# Altium PCB pcb.PcbDoc (part 2 of 6)
Units mm, origin at the board's own origin, x right, y up, seen from the top; angles counter-clockwise.
Board outline 163.6 x 137.4 mm, 4 copper layers (Top Layer, GND2, GND3, Bottom Layer), stack 1.586 mm thick; 362 components, 323 nets, 1261 pads, 657 vias.
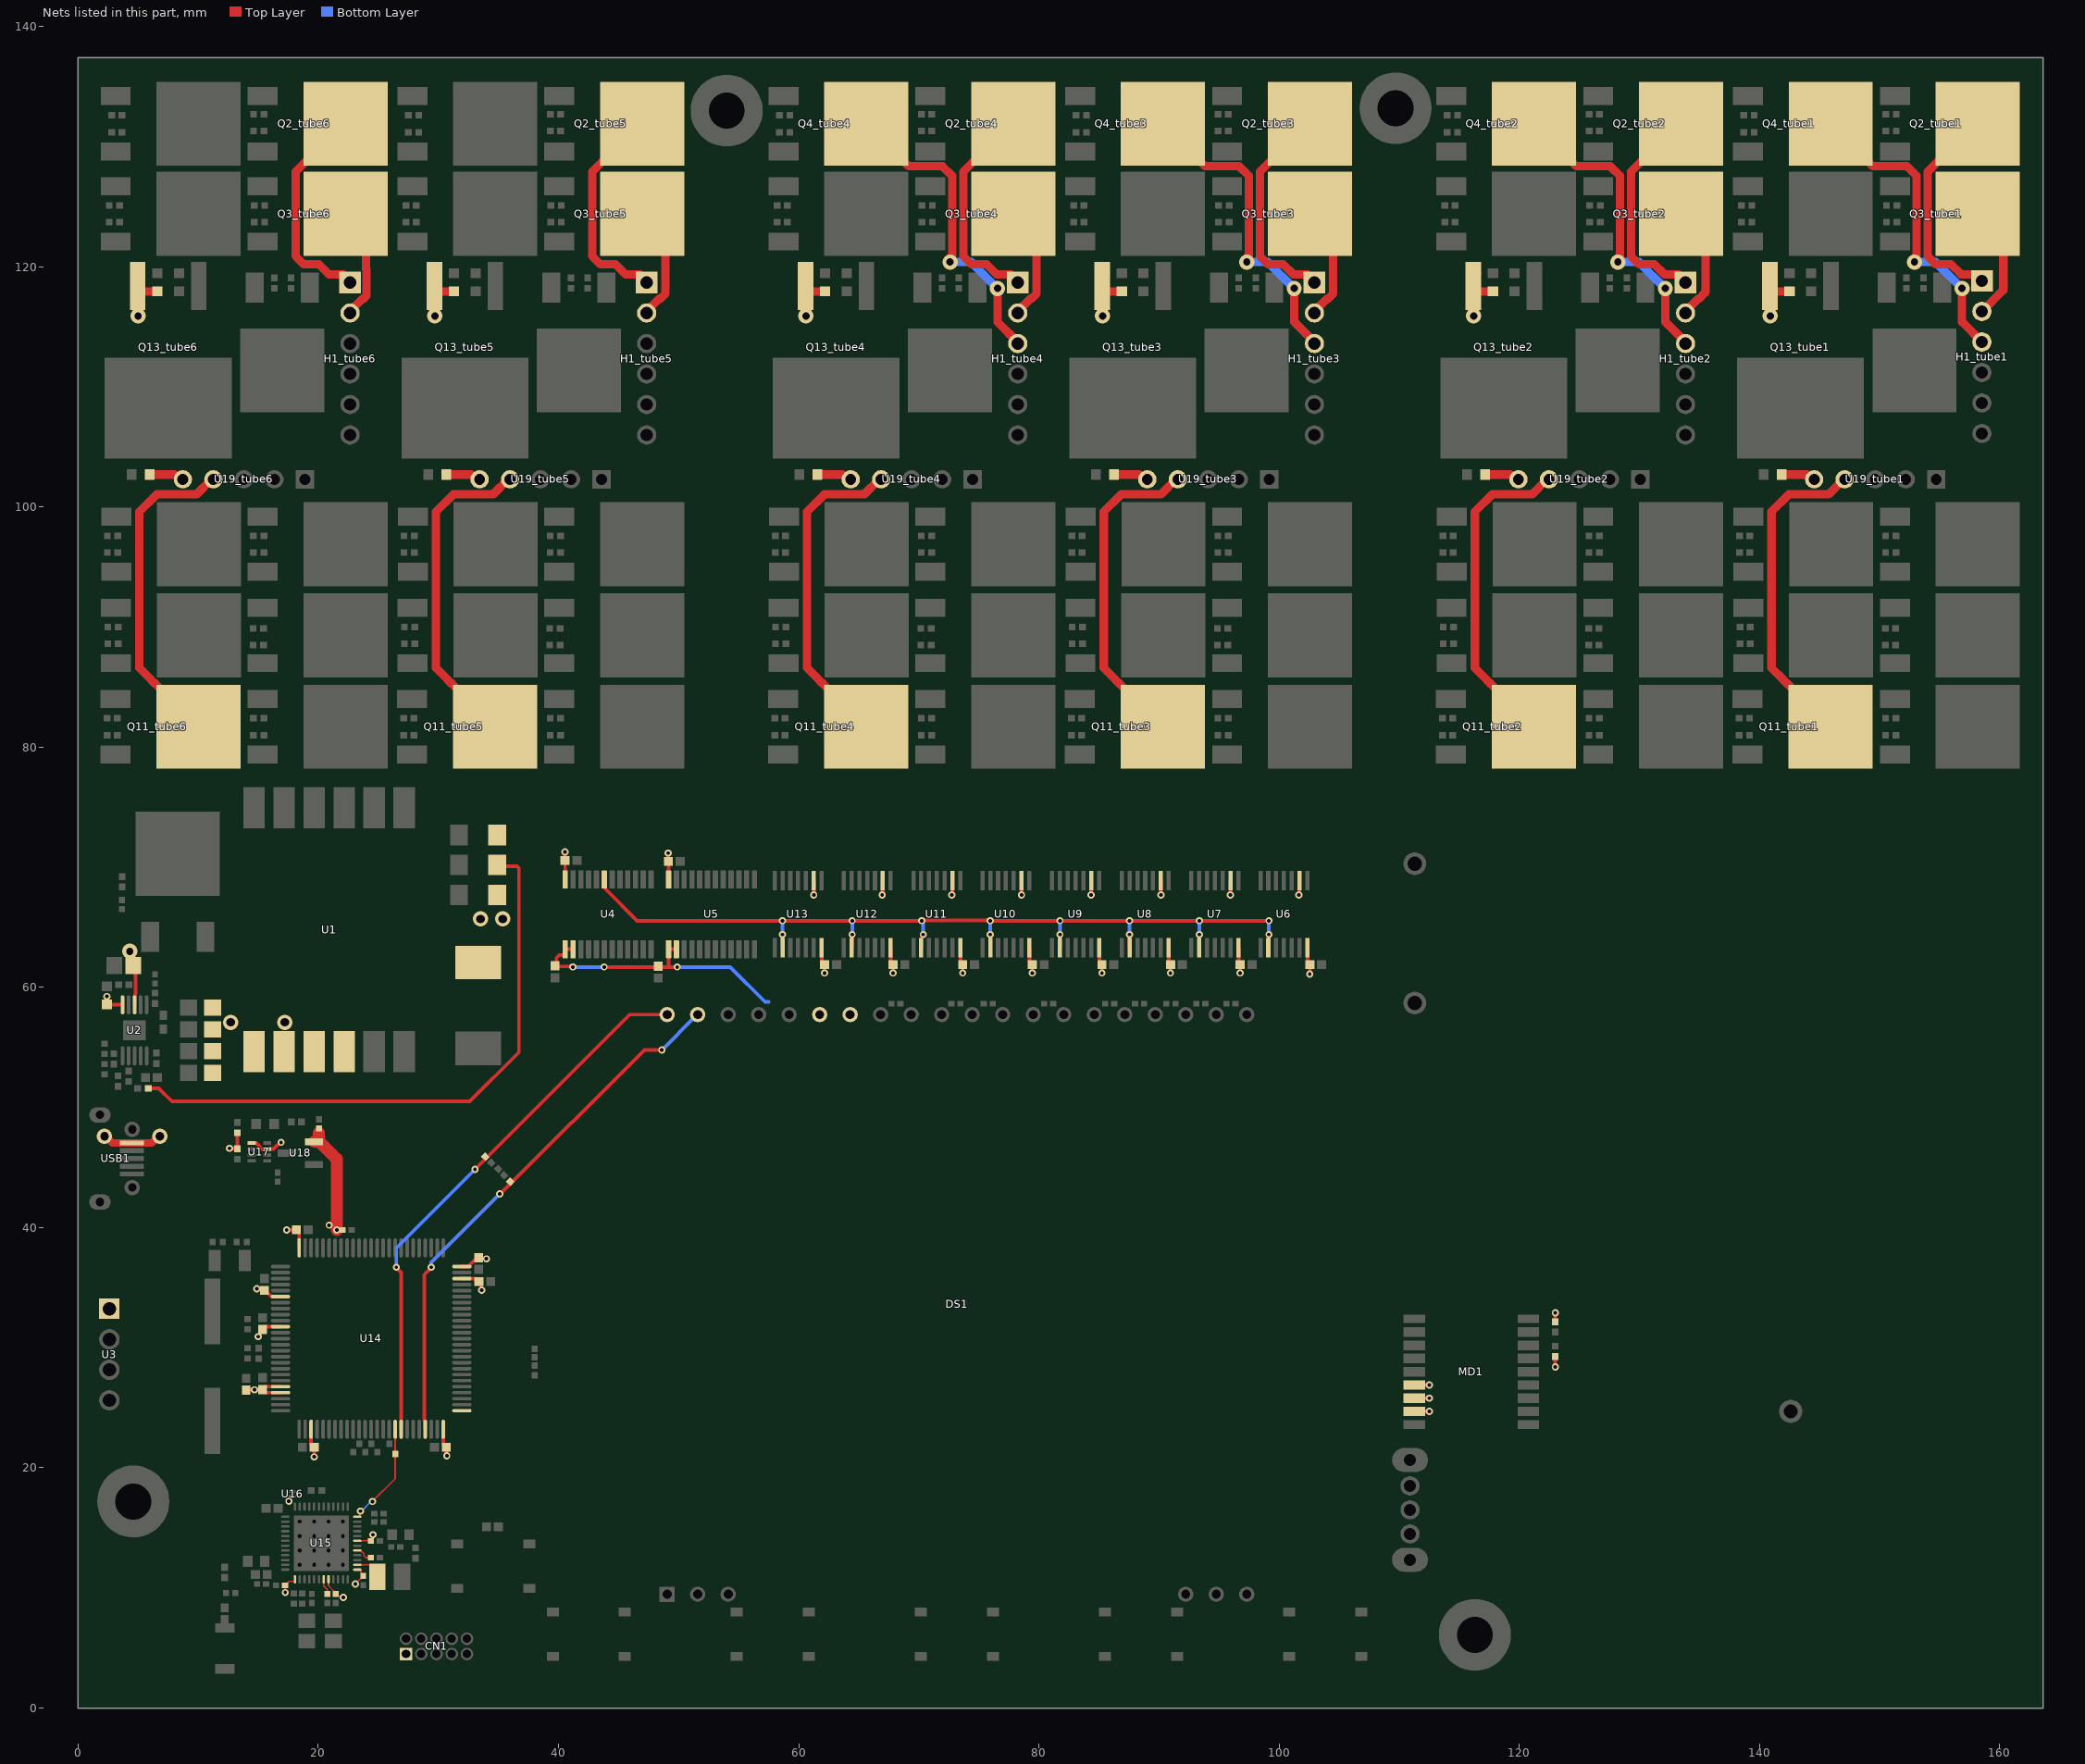
[diagram p4: the nets of this part, all layers, seen from the top]

## Footprints (in the part's own frame and the unit in brackets; to place one, negate y for a bottom-side part, rotate by r counter-clockwise, add the part's x,y. Pads: shape width x height; smd on the part's side, far side on the other; paste and mask are expansions set on the pad) (continued)
DA2032-ALD [mm] "Audio Transformers. SMD-12 Audio Transformers ROHS"
  rect 3.43x1.79 smd: 1(-10.155,6.25) 2(-10.155,3.75) 3(-10.155,1.25) 4(-10.155,-1.25) 5(-10.155,-3.75) 6(-10.155,-6.25) 7(10.155,-6.25) 8(10.155,-3.75) 9(10.155,-1.25) 10(10.155,1.25) 11(10.155,3.75) 12(10.155,6.25)
  silkscreen extent -7.5,-8.6 7.5,8.6, body extent -11,-8.6 11,8.6, height 8.64
"EA DOGL128W-6" [mil]
  rect 50x50 / inner round 60 / far side rect 50x50 hole 30 paste-99999 mask+0: 1(-995,915)
  round 50 / inner round 60 / far side round 50 hole 30 paste-99999 mask+0: 2(-995,815) 3(-995,715) 18(-995,-785) 19(-995,-885) 20(-995,-985) 21(905,-985) 22(905,-885) 23(905,-785) 24(905,-685) 25(905,-585) 26(905,-485) 27(905,-385) 28(905,-285) 29(905,-185) 30(905,-85) 31(905,15) 32(905,115) 33(905,215) 34(905,315) 35(905,415) 36(905,515) 37(905,615) 38(905,715) 39(905,815) 40(905,915)
  silkscreen extent -994,-1374 904,1304, body extent -1000,-1369 920,1299, height 115
FP-CL50-IPC_C [mm]
  rect 0.515x0.472 smd paste+0 mask+0: 1(-0.379,0) 2(0.379,0)
  silkscreen extent -0.2,0.67 0.01,0.67, body extent -0.74,-0.38 0.74,0.38, height 0.25
FP-CL165-IPC_C [mm]
  rect 0.515x0.472 smd paste+0 mask+0: 1(-0.379,0) 2(0.379,0)
  silkscreen extent -0.64,-0.67 0.64,0.67, body extent -0.74,-0.38 0.74,0.38, height 0.25
FP-CL282-IPC_C [mm]
  rect 0.515x0.472 smd paste+0 mask+0: 1(-0.379,0) 2(0.379,0)
  silkscreen extent -0.64,0.67 0.64,0.67, body extent -0.74,-0.38 0.74,0.38, height 0.25
FP-CL388-IPC_C [mm]
  rect 0.515x0.472 smd paste+0 mask+0: 1(-0.379,0) 2(0.379,0)
  silkscreen extent -0.64,-0.67 0.64,0.67, body extent -0.74,-0.38 0.74,0.38, height 0.25
FP-CL542-IPC_C [mm]
  rect 0.515x0.472 smd paste+0 mask+0: 1(-0.379,0) 2(0.379,0)
  silkscreen extent -0.64,-0.67 0.64,-0.67, body extent -0.74,-0.38 0.74,0.38, height 0.25
FP-GJM155-0_05-IPC_B [mm]
  rect 0.615x0.572 smd paste+0 mask+0: 1(-0.429,0) 2(0.429,0)
  silkscreen extent -0.74,-0.69 0.74,0.69, body extent -0.89,-0.44 0.89,0.44, height 0.25
FP-LQG15HH_02-IPC_A [mm]
  rect 0.715x0.672 smd paste+0 mask+0: 1(-0.479,0) 2(0.479,0)
  silkscreen extent -0.55,-0.74 0.84,0.74, body extent -1.04,-0.54 1.04,0.54, height 0.25
FP-LQG15HH_02-IPC_C [mm]
  rect 0.515x0.472 smd paste+0 mask+0: 1(-0.379,0) 2(0.379,0)
  silkscreen extent -0.64,-0.67 0.64,0.67, body extent -0.74,-0.38 0.74,0.38, height 0.25
FP-LQM2HPN_G0-IPC_B [mm]
  rect 1.355x2.206 smd paste+0 mask+0: 1(-1.026,0) 2(1.026,0)
  silkscreen extent -1.7,-1.5 1.7,1.5, body extent -1.95,-1.35 1.95,1.35, height 0.25
FP-MAX-M10S-00B-MFG [mm]
  rect 1.8x0.7 smd paste-1000 mask+0: 1(-4.75,4.4) 9(-4.75,-4.4) 10(4.75,-4.4) 18(4.75,4.4)
  rect 1.8x0.8 smd paste-1000 mask+0: 2(-4.75,3.3) 3(-4.75,2.2) 4(-4.75,1.1) 5(-4.75,0) 6(-4.75,-1.1) 7(-4.75,-2.2) 8(-4.75,-3.3) 11(4.75,-3.3) 12(4.75,-2.2) 13(4.75,-1.1) 14(4.75,0) 15(4.75,1.1) 16(4.75,2.2) 17(4.75,3.3)
  silkscreen extent -7,-5.35 4.9,5.35, body extent -5.75,-5.45 5.75,5.45, height 0.25
FP-PG-TO252-3-MFG [mm]
  rect 1.5x2.5 smd paste+0 mask+0: 1(-2.3,-4.575) 3(2.3,-4.575)
  rect 7x7 smd paste+0 mask+0: 4(0,2.325)
  silkscreen extent -3.36,-2.28 3.36,-1.55, body extent -3.6,-5.92 3.6,5.92, height 0.25
FP-PW0014A-MFG [mm]
  rect 1.6x0.35 smd paste-1000 mask+0: 1(-2.8,1.95) 2(-2.8,1.3) 3(-2.8,0.65) 4(-2.8,0) 5(-2.8,-0.65) 6(-2.8,-1.3) 7(-2.8,-1.95) 8(2.8,-1.95) 9(2.8,-1.3) 10(2.8,-0.65) 11(2.8,0) 12(2.8,0.65) 13(2.8,1.3) 14(2.8,1.95)
  silkscreen extent -4.32,-2.55 2.25,2.55, body extent -3.7,-2.8 3.7,2.8, height 0.25
FP-PW0024A-MFG [mm]
  rrect22% 1.5x0.45 smd paste+0 mask+0: 1(-2.9,3.575) 2(-2.9,2.925) 3(-2.9,2.275) 4(-2.9,1.625) 5(-2.9,0.975) 6(-2.9,0.325) 7(-2.9,-0.325) 8(-2.9,-0.975) 9(-2.9,-1.625) 10(-2.9,-2.275) 11(-2.9,-2.925) 12(-2.9,-3.575) 13(2.9,-3.575) 14(2.9,-2.925) 15(2.9,-2.275) 16(2.9,-1.625) 17(2.9,-0.975) 18(2.9,-0.325) 19(2.9,0.325) 20(2.9,0.975) 21(2.9,1.625) 22(2.9,2.275) 23(2.9,2.925) 24(2.9,3.575)
  silkscreen extent -4.37,-3.95 1.78,3.95, body extent -3.75,-4.2 3.75,4.2, height 0.25
HMT-2.54-1_5PM [mil] "Female Headers. -40C~+105C 1 1x5P 2.54mm 2.54mm 3.2mm 3A 5P 8.5mm Brass Gold Square Hole Through Hole Top ,P=2.54mm Female Headers ROHS"
  rect 60x60 hole 36: 1(-200,0)
  round 60 hole 36: 2(-100,0) 3(0,0) 4(100,0) 5(200,0)
  silkscreen extent -250,-50 250,50, body extent -258,-49 258,49, height 335
"HX JN1.27-2x5P ZZ H4.9" [mm] "IDC Connectors. -40C~+105C 1.27mm 1.27mm 1A 2 2x5P 5 500V Black Copper Gold IDC Header Through Hole Plugin,P=1.27mm IDC Connectors ROHS"
  rect 1.05x1.05 hole 0.7: 1(-2.54,-0.635)
  round 1.05 hole 0.7: 2(-2.54,0.635) 3(-1.27,-0.635) 4(-1.27,0.635) 5(0,-0.635) 6(0,0.635) 7(1.27,-0.635) 8(1.27,0.635) 9(2.54,-0.635) 10(2.54,0.635)
  silkscreen extent -6.32,-2.5 6.33,2.5, body extent -6.27,-2.5 6.27,2.5
IC_NRF7002-QFAA-R7 [mm]
  oval 0.7x0.2 smd: 1(-3,2.2) 2(-3,1.8) 3(-3,1.4) 4(-3,1) 5(-3,0.6) 6(-3,0.2) 7(-3,-0.2) 8(-3,-0.6) 9(-3,-1) 10(-3,-1.4) 11(-3,-1.8) 12(-3,-2.2) 25(3,-2.2) 26(3,-1.8) 27(3,-1.4) 28(3,-1) 29(3,-0.6) 30(3,-0.2) 31(3,0.2) 32(3,0.6) 33(3,1) 34(3,1.4) 35(3,1.8) 36(3,2.2)
  oval 0.2x0.7 smd: 13(-2.2,-3) 14(-1.8,-3) 15(-1.4,-3) 16(-1,-3) 17(-0.6,-3) 18(-0.2,-3) 19(0.2,-3) 20(0.6,-3) 21(1,-3) 22(1.4,-3) 23(1.8,-3) 24(2.2,-3) 37(2.2,3.05) 38(1.8,3.05) 39(1.4,3.05) 40(1,3.05) 41(0.6,3.05) 42(0.2,3.05) 43(-0.2,3.05) 44(-0.6,3.05) 45(-1,3.05) 46(-1.4,3.05) 47(-1.8,3.05) 48(-2.2,3.05)
  rect 4.6x4.6 smd paste-3: 49(0,0)
  round 0.63 hole 0.33 mask+0: 50(-1.8,1.8) 51(-0.6,1.8) 52(0.6,1.8) 53(1.8,1.8) 54(-1.8,0.6) 55(-0.6,0.6) 56(0.6,0.6) 57(1.8,0.6) 58(-1.8,-0.6) 59(-0.6,-0.6) 60(0.6,-0.6) 61(1.8,-0.6) 62(-1.8,-1.8) 63(-0.6,-1.8) 64(0.6,-1.8) 65(1.8,-1.8)
  silkscreen extent -4.1,-3 3,3, body extent -3,-3 3,3, height 0.9
IRF9640STRLPbF [mm] "MOSFETs. -55C~+150C 1 P-Channel 1.2nF 125W 200V 370pF 44nC@10V 4V 500mohm@10V 6.8A 81pF P-Channel TO-263(D2PAK) MOSFETs ROHS"
  rect 4x1.3 smd: 1(-5.086,2.54) 3(-5.086,-2.54)
  rect 8.4x10.566 smd: 4(5.086,0)
  silkscreen extent -6.33,-5.08 0.61,5.09, body extent -6.31,-5.1 8.71,5.1
JT-2450AT18A100-2_V [mm] "Chip Antenna, 2-Leads, Body 3.4x1.8mm"
  rect 0.8x1.6 smd: 1(-1.7,0) 2(1.7,0)
  silkscreen extent -0.91,-0.9 0.91,0.9, body extent -1.7,-0.9 1.7,0.9, height 1.4
LT-MSE-10-EDP_N [mm] "SOP, 10-Leads, Body 3.1x3.1mm, Pitch 0.5mm, Thermal Pad 1.88x1.68mm, IPC Medium Density"
  oval 1.6x0.3 smd: 1(-2.125,1) 2(-2.125,0.5) 3(-2.125,0) 4(-2.125,-0.5) 5(-2.125,-1) 6(2.125,-1) 7(2.125,-0.5) 8(2.125,0) 9(2.125,0.5) 10(2.125,1)
  rect 1.68x1.88 smd: 11(0,0)
  silkscreen extent -0.92,-1.55 0.92,1.55, body extent -1.55,-1.55 1.55,1.55, height 1.1
MicroXNJ [mm] "USB Connectors. -20C~+85C 1 1.8A 30V 5,000 times 5P Black Female Micro-B Surface Mount, Right Angle USB 2.0 SMD USB Connectors ROHS"
  rect 2x0.4 smd: 1(-1.332,-1.3) 2(-1.332,-0.65) 3(-1.332,0) 4(-1.332,0.65) 5(-1.332,1.3)
  round 1.3 hole 0.7: 6(-1.34,2.425) 9(-1.34,-2.425)
  oval 1.8x1.3 hole 0.7 slot 1.1 at 90 deg: 7(1.34,3.625) 8(1.34,-3.625)
  silkscreen extent -4.19,-7.95 0.07,3.79, body extent -2.11,-4.02 3.85,3.98
Molex_GPS_L1_L5_GLONASS_36MM_STACKED_2116240001 [mm]
  round 1.93 hole 1.168: 1(0,4)
  silkscreen extent -18.54,-18.54 18.54,18.54, body extent -17.95,-18.03 19.05,17.97, height 7.7
ONSC-SMC-2-403-03_V [mil] "Molded, 2-Leads, Body 6.86x5.84mm"
  rect 110x150 smd: 1(-140.49,0) 2(140.49,0)
  silkscreen extent -222,-115 135,115, body extent -135,-115 135,115, height 99
Q13FC13500004 [mm] "Crystals. -40C~+85C 12.5pF 32.768kHz 70kohm Crystal Oscillator +/-20ppm SMD3215-2P Crystals ROHS"
  rect 1x1.8 smd: 1(-1.25,0) 2(1.25,0)
  silkscreen extent -0.47,-0.76 0.47,0.76, body extent -1.6,-0.75 1.6,0.75
"RES 0402_1005" [mm] "Chip Resistor, 2-Leads, Body 1.0x0.5mm, IPC Medium Density"
  rect 0.75x0.6 smd: 1(-0.575,0) 2(0.575,0)
  body extent -0.5,-0.25 0.5,0.25, height 0.35
SOT-23A-CB3_N [mm] "SOT346, 3-Leads, Body 2.9x1.5mm, Pitch 0.95mm, Lead Span 2.6mm, IPC Medium Density"
  rect 1.5x0.6 smd: 1(-1.15,0.95) 2(-1.15,-0.95) 3(1.15,0)
  silkscreen extent -1.28,-1.55 0.9,1.92, body extent -0.9,-1.55 0.9,1.55, height 1.45
"SS12D07VG4 087" [mm] "Slide Switches. SS12D07VG4 087"
  round 1.6 hole 1: 1(-2,0) 2(0,0) 3(2,0)
  oval 2x3 hole 1 slot 1.8 at 0 deg: 4(4.15,0) 5(-4.15,0)
  silkscreen extent -4.4,-2.3 4.4,2.3, body extent -4.4,-2.3 4.4,2.3
STM32L433VCT6 [mm] "ST Microelectronics. -40C~+85C 1.71V~3.6V 12bit 12bit 256KB 32 Bit 64KB 80MHz 83 ARM Cortex-M4 Built-in FLASH LQFP-100(14x14) Microcontrollers (MCU/MPU/SOC) ROHS"
  oval 0.3x1.6 smd: 1(-6,-7.55) 2(-5.5,-7.55) 3(-5,-7.55) 4(-4.5,-7.55) 5(-4,-7.55) 6(-3.5,-7.55) 7(-3,-7.55) 8(-2.5,-7.55) 9(-2,-7.55) 10(-1.5,-7.55) 11(-1,-7.55) 12(-0.5,-7.55) 13(0,-7.55) 14(0.5,-7.55) 15(1,-7.55) 16(1.5,-7.55) 17(2,-7.55) 18(2.5,-7.55) 19(3,-7.55) 20(3.5,-7.55) 21(4,-7.55) 22(4.5,-7.55) 23(5,-7.55) 24(5.5,-7.55) 25(6,-7.55) 51(6,7.55) 52(5.5,7.55) 53(5,7.55) 54(4.5,7.55) 55(4,7.55) 56(3.5,7.55) 57(3,7.55) 58(2.5,7.55) 59(2,7.55) 60(1.5,7.55) 61(1,7.55) 62(0.5,7.55) 63(0,7.55) 64(-0.5,7.55) 65(-1,7.55) 66(-1.5,7.55) 67(-2,7.55) 68(-2.5,7.55) 69(-3,7.55) 70(-3.5,7.55) 71(-4,7.55) 72(-4.5,7.55) 73(-5,7.55) 74(-5.5,7.55) 75(-6,7.55)
  oval 1.6x0.3 smd: 26(7.55,-6) 27(7.55,-5.5) 28(7.55,-5) 29(7.55,-4.5) 30(7.55,-4) 31(7.55,-3.5) 32(7.55,-3) 33(7.55,-2.5) 34(7.55,-2) 35(7.55,-1.5) 36(7.55,-1) 37(7.55,-0.5) 38(7.55,0) 39(7.55,0.5) 40(7.55,1) 41(7.55,1.5) 42(7.55,2) 43(7.55,2.5) 44(7.55,3) 45(7.55,3.5) 46(7.55,4) 47(7.55,4.5) 48(7.55,5) 49(7.55,5.5) 50(7.55,6) 76(-7.55,6) 77(-7.55,5.5) 78(-7.55,5) 79(-7.55,4.5) 80(-7.55,4) 81(-7.55,3.5) 82(-7.55,3) 83(-7.55,2.5) 84(-7.55,2) 85(-7.55,1.5) 86(-7.55,1) 87(-7.55,0.5) 88(-7.55,0) 89(-7.55,-0.5) 90(-7.55,-1) 91(-7.55,-1.5) 92(-7.55,-2) 93(-7.55,-2.5) 94(-7.55,-3) 95(-7.55,-3.5) 96(-7.55,-4) 97(-7.55,-4.5) 98(-7.55,-5) 99(-7.55,-5.5) 100(-7.55,-6)
  silkscreen extent -7.03,-8 6.25,6.25, body extent -8,-8 8,8
TCK106AG,LF [mm] "Power Distribution Switches. -40C~+85C 1 1.1V~5.5V 1A 34mohm Active High Load Switch WCSPD-4(0.79x0.79) Power Distribution Switches ROHS"
  round 0.208 smd: A1(-0.2,0.2) A2(0.2,0.2) B1(-0.2,-0.2) B2(0.2,-0.2)
  body extent -0.39,-0.39 0.4,0.39
TPS2117DRLR [mm] "Analog Switches / Multiplexers. -40C~+105C 1.6V~5.5V 2 20mohm 2:1 Fault protection SOT-5X3 Analog Switches, Multiplexers ROHS"
  rect 0.28x0.68 smd: 1(-0.75,-0.64) 2(-0.25,-0.64) 3(0.25,-0.64) 4(0.75,-0.64) 5(0.75,0.64) 6(0.25,0.64) 7(-0.25,0.64) 8(-0.75,0.64)
  body extent -1.05,-0.8 1.05,0.8
TS-1187A-B-A-B [mm] "Tactile Switches. -30C~+85C 1.5mm 1.6N 100,000 cycles 12V 5.1mm 5.1mm 50mA Gold No Round Button SPST Surface Mount,Vertical Without Bracket SMD-4P,5.1x5.1mm Tactile Switches ROHS"
  rect 1x0.75 smd: 1(-3,1.85) 2(3,1.85) 3(-3,-1.85) 4(3,-1.85)
  silkscreen extent -2.55,-2.55 2.55,2.55, body extent -3.25,-2.6 3.25,2.6
TZ0308D [mm] "Crystals. -30C~+85C 30ohm 40MHz 9pF Crystal Oscillator +/-10ppm SMD3225-4P Crystals ROHS"
  rect 1.4x1.2 smd: 1(-1.1,-0.85) 2(1.1,-0.85) 3(1.1,0.85) 4(-1.1,0.85)
  silkscreen extent -2.26,-1.91 2.03,1.68, body extent -1.6,-1.25 1.6,1.25
X49SM4MSD2SC [mm] "Crystals. -20C~+70C 120ohm 20pF 4MHz Crystal Oscillator +/-20ppm +/-30ppm HC-49S-SMD Crystals ROHS"
  rect 5.5x1.3 smd: 1(4.553,0) 2(-4.553,0)
  silkscreen extent -5.72,-2.41 5.71,2.41, body extent -6.25,-2.25 6.25,2.25

## Part data
C1 C2 C3: "Multilayer Ceramic Capacitors MLCC - SMD/SMT. 220nF 250V X7R +/-10% 1206 Multilayer Ceramic Capacitors MLCC - SMD/SMT ROHS", JLCPCB Part #=C1322383, Manufacturer="FH (Guangdong Fenghua Advanced Tech)", Component Type=Capacitors, Design Item ID=1206B224K251NT, Manufacturer Part Number=1206B224K251NT
C4: library part CMP-13271-000627-1, "Cap Ceramic 3.3nF 50V X7R ±10% SMD 0402 +125°C Paper T/R", Capacitance=3.3nF, Case Code (Imperial)=0402, Case Code (Metric)=1005, Dielectric=X7R, Max Operating Temperature=125°C, Min Operating Temperature=-55°C, Package Quantity=1, Tolerance=10%, Voltage=50V, Case/Package=0402, Contact Plating=Tin, Depth=0.5mm, Height=0.5mm, Lead Free="Lead Free", Length=1mm, Material=Ceramic, Mount="Surface Mount", Packaging="Tape and Reel", Radiation Hardening=No, Thickness=0.022inch, Voltage Rating=50V, Voltage Rating (DC)=50V, Width=0.02inch
C5 C6 C7 C8: "Multilayer Ceramic Capacitors MLCC - SMD/SMT. 47uF 6.3V X5R +/-20% 0805 Multilayer Ceramic Capacitors MLCC - SMD/SMT ROHS", JLCPCB Part #=C16780, Manufacturer="Samsung Electro-Mechanics", Component Type=Capacitors, Design Item ID=CL21A476MQYNNNE, Manufacturer Part Number=CL21A476MQYNNNE
C9 C50: library part CMP-13271-000387-1, "Cap Ceramic 10nF 50V X7R ±10% SMD 0402 +125°C Paper T/R", Capacitance=10nF, Case Code (Imperial)=0402, Case Code (Metric)=1005, Dielectric=X7R, Max Operating Temperature=125°C, Min Operating Temperature=-55°C, Package Quantity=1, Tolerance=10%, Voltage=50V, Case/Package=0402, Contact Plating=Tin, Depth=0.5mm, Height=0.5mm, Lead Free="Lead Free", Length=1mm, Material=Ceramic, Mount="Surface Mount", Packaging="Tape and Reel", Radiation Hardening=No, Thickness=0.022inch, Voltage Rating=50V, Voltage Rating (DC)=50V, Width=0.02inch
C10: "CAP CER 47UF 6.3V X5R 0805", Capacitance="47 µF", Device Package="0805 (2012 Metric)", Manufacturer="Samsung Electro-Mechanics", Operating Temperature="-55°C ~ 85°C", Supplier Part Number 1=1276-1852-1-ND, Temperature Coefficient=X5R, Tolerance=±20%, Voltage - Rated=6.3V, Applications="General Purpose", ComponentLink1Description=Datasheet, ComponentLink1URL=http://www.samsungsem.com/kr/support/product-search/mlcc/CL21A476MQYNNNE.jsp, ComponentLink2Description="DigiKey Link", ComponentLink2URL=https://www.digikey.com/en/products/detail/samsung-electro-mechanics/CL21A476MQYNNNE/3887510, lastupdated="4/6/2026 7:33:17 PM", Lifecycle Status=Active, Minimum Order=1, Mounting Type="Surface Mount, MLCC", Package / Case="0805 (2012 Metric)", Packaging=TapeAndReel, Part Number=CL21A476MQYNNNE, Part Status=Active, partid=3143, price=0.04, series=CL, Size / Dimension="0.079\" L x 0.049\" W (2.00mm x 1.25mm)", Supplier 1=DigiKey, Thickness (Max)="0.057\" (1.45mm)"
C11: "Multilayer Ceramic Capacitors MLCC - SMD/SMT. 100pF 50V C0G +/-5% 0402 Multilayer Ceramic Capacitors MLCC - SMD/SMT ROHS", JLCPCB Part #=C1546, Manufacturer="FH (Guangdong Fenghua Advanced Tech)", Component Type=Capacitors, Design Item ID=0402CG101J500NT, Manufacturer Part Number=0402CG101J500NT
C12 C43: "Multilayer Ceramic Capacitors MLCC - SMD/SMT. 22nF 50V X7R +/-10% 0402 Multilayer Ceramic Capacitors MLCC - SMD/SMT ROHS", JLCPCB Part #=C1532, Manufacturer="FH (Guangdong Fenghua Advanced Tech)", Component Type=Capacitors, Design Item ID=0402B223K500NT, Manufacturer Part Number=0402B223K500NT
C13 C14 C15 C16 C17 C18 C19 C20 C21 C22 C23 C24 C25 C27 C28 C29 C30 C33 C34 C37 C38 C66 C67 C68 C69: library part CMP-2000-05439-1, "Chip Capacitor, 100 nF, +/- 10%, 16 V, -55 to 125 degC, 0402 (1005 Metric), RoHS, Tape and Reel", Capacitance=100nF, Case Size/Dimension=0402, Dielectric=X7R, Manufacturer="Samsung Electro-Mechanics", Rated Voltage=16V, Tolerance (%)=±10%, Datasheet URL=https://datasheet.ciiva.com/29198/458718-da-01-en-vs-kondensator-0402-29198423.pdf, Datasheet Version=Nov-10, Manufacturer URL=http://www.samsungsem.com/global/index.jsp
C26 C40 C46 C51 C52: library part CMP-13271-000548-1, "Cap Ceramic 4.7uF 10V X5R ±20% SMD 0402 +85°C Paper T/R", Capacitance=4.7uF, Case Code (Imperial)=0402, Case Code (Metric)=1005, Dielectric=X5R, Max Operating Temperature=85°C, Min Operating Temperature=-55°C, Package Quantity=10000, Tolerance=20%, Voltage Rating=10V, Case/Package=0402, Lead Free="Lead Free", Length=0.039inch, Mount="Surface Mount", Packaging="Tape and Reel", Thickness=0.022inch, Width=0.02inch
C31 C32 C35: "Multilayer Ceramic Capacitors MLCC - SMD/SMT. 22pF 50V C0G +/-5% 0402 Multilayer Ceramic Capacitors MLCC - SMD/SMT ROHS", JLCPCB Part #=C1555, Manufacturer="FH (Guangdong Fenghua Advanced Tech)", Component Type=Capacitors, Design Item ID=0402CG220J500NT, Manufacturer Part Number=0402CG220J500NT
C36: "Multilayer Ceramic Capacitors MLCC - SMD/SMT. 33pF 50V C0G +/-5% 0402 Multilayer Ceramic Capacitors MLCC - SMD/SMT ROHS", JLCPCB Part #=C1562, Manufacturer="FH (Guangdong Fenghua Advanced Tech)", Component Type=Capacitors, Design Item ID=0402CG330J500NT, Manufacturer Part Number=0402CG330J500NT
C39 C44: "Multilayer Ceramic Capacitors MLCC - SMD/SMT. 25V 470nF X7R +/-10% 0603 Multilayer Ceramic Capacitors MLCC - SMD/SMT ROHS", JLCPCB Part #=C1623, Manufacturer="Samsung Electro-Mechanics", Component Type=Capacitors, Design Item ID=CL10B474KA8NNNC, Manufacturer Part Number=CL10B474KA8NNNC
C41: library part CMP-2008-03808-2, "Multi-Layer Ceramic Capacitor 1pF C0G  ±0.1pF 0402 Paper T/R", Capacitance=1pF, Case Code (Imperial)=0402, Case Code (Metric)=1005, Dielectric=C0G, Max Operating Temperature=125°C, Min Operating Temperature=-55°C, Package Quantity=10000, Temperature Coefficient=30ppm/°C, Voltage=50V, Case/Package=0402, Depth=0.5mm, Height=0.5mm, Lead Free="Lead Free", Lead Pitch=0.3mm, Length=1mm, Mount="Surface Mount", Number of Pins=2, Packaging="Tape and Reel", Radiation Hardening=No, REACH SVHC="No SVHC", Termination=SMD/SMT, Thickness=0.022inch, Voltage Rating=50V, Voltage Rating (DC)=50V, Width=0.02inch
C42: "Multilayer Ceramic Capacitors MLCC - SMD/SMT. 16V 220nF X7R +/-10% 0402 Multilayer Ceramic Capacitors MLCC - SMD/SMT ROHS", JLCPCB Part #=C16772, Manufacturer="Samsung Electro-Mechanics", Component Type=Capacitors, Design Item ID=CL05B224KO5NNNC, Manufacturer Part Number=CL05B224KO5NNNC
C45 C47 C53: library part CMP-13271-001039-1, "Cap Ceramic 2.2uF 6.3V X5R ±20% SMD 0402 +85°C Paper T/R", Capacitance=2.2uF, Case Code (Imperial)=0402, Case Code (Metric)=1005, Dielectric=X5R, Max Operating Temperature=85°C, Min Operating Temperature=-55°C, Package Quantity=10000, Tolerance=20%, Voltage Rating=6.3V, Case/Package=0402, Depth=0.5mm, Height=0.5mm, Lead Free="Lead Free", Length=1mm, Mount="Surface Mount", Packaging="Tape and Reel", Radiation Hardening=No, Thickness=0.022inch, Width=0.02inch
C48 C49 C54 C55 C56 C57 C58 C59 C60 C61 C62 C63 C64 C65: library part CMP-13271-001051-1, "Cap Ceramic 1uF 25V X5R ±10% SMD 0402 +85°C Paper T/R", Capacitance=1uF, Case Code (Imperial)=0402, Case Code (Metric)=1005, Dielectric=X5R, Max Operating Temperature=85°C, Min Operating Temperature=-55°C, Package Quantity=10000, Tolerance=10%, Voltage Rating=25V, Case/Package=0402, Depth=0.5mm, Height=0.5mm, Lead Free="Lead Free", Length=1mm, Material=Ceramic, Mount="Surface Mount", Packaging="Tape and Reel", Radiation Hardening=No, Thickness=0.022inch, Width=0.02inch
CN1: "IDC Connectors. -40C~+105C 1.27mm 1.27mm 1A 2 2x5P 5 500V Black Copper Gold IDC Header Through Hole Plugin,P=1.27mm IDC Connectors ROHS", JLCPCB Part #=C42372547, Manufacturer=hanxia, Component Type=Connectors, Design Item ID="HX JN1.27-2x5P ZZ H4.9", Manufacturer Part Number="HX JN1.27-2x5P ZZ H4.9"
D1: library part CMP-1055-00379-1, "200 V, 3 A Schottky Fast Soft-Recovery Power Rectifier, 2-Pin SMC, Pb-Free, Tape and Reel", Manufacturer="On Semiconductor", ComponentLink1Description="Manufacturer URL", ComponentLink1URL=http://www.onsemi.com/, ComponentLink2Description=Datasheet, ComponentLink2URL=http://www.onsemi.cn/pub_link/Collateral/MBRS3201T3-D.PDF, ComponentLink3Description="Package Specification", ComponentLink3URL=http://www.onsemi.com/pub_link/Collateral/403-03.PDF, Configuration=Single, DatasheetVersion="Rev. 3", IFSM Max (A)=100, Mounting Technology="Surface Mount", PackageDescription="2-Pin Small Molded Package, J-Bend Lead, Body 5.845 x 6.855 mm", PackageReference=SMC-2-403-03, PackageVersion="Rev. E, 08/2005", Packing="Tape and Reel", PartNumber=MBRS3201T3G, RoHS=TRUE, trr Max (ns)=35
DS1: Supplier Part Number 1=1481-1058-ND, Supplier 1=DigiKey
E1: library part CMP-2000-05167-1, "Ceramic Antenna, 2.45 GHZ, 2 W, -40 to 125 degC, 2-Pin SMD, RoHS, Tape and Reel", Manufacturer="Johanson Technology", Maximum Frequency=2500MHz, Minimum Frequency=2400MHz, Package=2Case18-4, Category=Antenna, Datasheet URL=http://www.johansontechnology.com/datasheets/antennas/2450AT18A100.pdf, Datasheet Version="Rev. 1.3, 07/2014", Manufacturer URL=https://www.johansontechnology.com/, Type=Ceramic, Typical Antenna Gain=0.5dB
E2: library part Molex_GPS_L1_L5_GLONASS_36MM_STACKED_2116240001, Supplier Part Number 1=211624-0001, ComponentLink1Description="Suppler 2", ComponentLink1URL=JLCPCB, ComponentLink2Description="Suppler Part Number 2", ComponentLink2URL=C177230, Supplier 1=Newark
H1_tube1 H1_tube2 H1_tube3 H1_tube4 H1_tube5 H1_tube6: "Pin Headers. -40C~+105C 1 1x6P 2.54mm 3.3mm 3A 6P Brass Square Hole Through Hole Top ,P=2.54mm Female Headers ROHS", JLCPCB Part #=C40877, Manufacturer="BOOMELE(Boom Precision Elec)", Manufacturer Part Number=2.54-1*6P, Component Type=Connectors, Design Item ID=2.54-1_6P
L1: library part CMP-06042-016451-1, "Multilayer Type Inductor for Power Lines, 1008 (2520), 3.3μH, 20%, 0.2Ω, 1000mA", Case Code (Imperial)=1008, Case Code (Metric)=2520, Current Rating=1A, DC Resistance (DCR)=200mR, Inductance=3.3uH, Max Operating Temperature=125°C, Min Operating Temperature=-55°C, Package Quantity=3000, Self Resonant Frequency=30MHz, Test Frequency=1MHz, Tolerance=20%, Case/Package=1008, Core Material=Ferrite, Depth=2.2mm, Height=0.9mm, Height - Seated (Max)=0.039inch, Lead Free="Lead Free", Length=2.5mm, Max DC Current=1A, Mount="Surface Mount", Packaging="Tape and Reel", Radiation Hardening=No, RoHS Compliant=Yes, series=LQM2HP_GC, Shielding=Shielded, Termination=SMD/SMT, Width=0.079inch
L2: library part CMP-06042-002811-1, "Multilayer type RF Inductor 3.9nH ±0.3nH 0.14Ω 750mA 0402", Case Code (Imperial)=0402, Case Code (Metric)=1005, Current Rating=300mA, DC Resistance (DCR)=180mR, Inductance=3.9nH, Max Operating Temperature=125°C, Min Operating Temperature=-55°C, Package Quantity=10000, Self Resonant Frequency=6GHz, Test Frequency=100MHz, Case/Package=0402, Core Material=Air, DC Current=300mA, Depth=0.55mm, Height=0.5mm, Height - Seated (Max)=0.022inch, Lead Free="Lead Free", Length=1mm, Max DC Current=300mA, Military Standard=Not, Mount="Surface Mount", Packaging="Tape and Reel", Q Factor=8, Radiation Hardening=No, Shielding=Unshielded, Termination=SMD/SMT, Width=0.02inch
L3: library part CMP-2000-06580-2, "Multilayer type RF Inductor 2.7nH ±0.3nH 0.12Ω 800mA 0402", Case Code (Imperial)=0402, Case Code (Metric)=1005, Current Rating=300mA, DC Resistance (DCR)=150mR, Inductance=2.7nH, Max Operating Temperature=125°C, Min Operating Temperature=-55°C, Package Quantity=10000, Self Resonant Frequency=6GHz, Test Frequency=100MHz, Case/Package=0402, Core Material=Air, DC Current=300mA, Depth=0.55mm, Height=0.5mm, Height - Seated (Max)=0.022inch, Lead Free="Lead Free", Length=1mm, Max DC Current=300mA, Military Standard=Not, Mount="Surface Mount", Packaging="Tape and Reel", Q Factor=8, Radiation Hardening=No, Shielding=Unshielded, Termination=SMD/SMT, Width=0.5mm
MD1: library part CMP-207130-000026-1, "GNSS LCC RX, ROM, TCXO, LNA, SAW"
Q1 Q2_tube1 Q2_tube2 Q2_tube3 Q2_tube4 Q2_tube5 Q2_tube6 Q3_tube1 Q3_tube2 Q3_tube3 Q3_tube4 Q3_tube5 Q3_tube6 Q4_tube1 Q4_tube2 Q4_tube3 Q4_tube4 Q4_tube5 Q4_tube6 Q5_tube1 Q5_tube2 Q5_tube3 Q5_tube4 Q5_tube5 Q5_tube6 Q6_tube1 Q6_tube2 Q6_tube3 Q6_tube4 Q6_tube5 Q6_tube6 Q7_tube1 Q7_tube2 Q7_tube3 Q7_tube4 Q7_tube5 Q7_tube6 Q8_tube1 Q8_tube2 Q8_tube3 Q8_tube4 Q8_tube5 Q8_tube6 Q9_tube1 Q9_tube2 Q9_tube3 Q9_tube4 Q9_tube5 Q9_tube6 Q10_tube1 Q10_tube2 Q10_tube3 Q10_tube4 Q10_tube5 Q10_tube6 Q11_tube1 Q11_tube2 Q11_tube3 Q11_tube4 Q11_tube5 Q11_tube6 Q12_tube1 Q12_tube2 Q12_tube3 Q12_tube4 Q12_tube5 Q12_tube6: library part CMP-32901-000070-1, "MOSFET N-CH 200V 5A DPAK", Continuous Drain Current=5A, Drain To Source Breakdown Voltage=200V, Drain To Source Resistance=600mΩ, Gate To Source Voltage=20V, Input Capacitace At Vds="300pF @ 25V", Manufacturer=Infineon, Max Forward Diode Voltage=1.3V, Max Junction Temp=+175°C, Package=PG-TO252-3, Power Dissipation=43W, Pulse Drain Current=20A, Temperature="-55°C to +175°C", Temperature Range Low=-55°C, Automotive=No, Category=Trans, ComponentLink2Description=Datasheet, ComponentLink2URL=https://www.infineon.com/dgdl/irfr220npbf.pdf?fileId=5546d462533600a40153562d8a7b206f, Depletion Mode=False, Device Class L1="Discrete Semiconductors", Device Class L2=Transistors, Device Class L3=MOSFETs, Digikey Description="MOSFET N-CH 200V 5A DPAK", Drain To Source Voltage=200V, Footprint Url=http://www.irf.com/package/hexfet/dpakfootprint.pdf, Gate Charge At Vgs="15nC @ 10V", Height=2.52mm, Lead Free=Yes, Manufacturer Part Number=IRFR220NTRPBF, Number Of Channels=1, Number Of N Channels=1, Octopart=https://octopart.com/irfr220ntrpbf-infineon-65874086, Reverse Recovery Charge=320nC, Reverse Recovery Time=90ns, RoHS=TRUE, Rthja Max=110°C/W, Temperature Range High=+175°C, Threshold Vgs Max=4V, Threshold Vgs Min=2V, Turn Off Delay Time=20ns, Turn On Delay Time=6.4ns
Q13_tube1 Q13_tube2 Q13_tube3 Q13_tube4 Q13_tube5 Q13_tube6: "MOSFETs. -55C~+150C 1 P-Channel 1.2nF 125W 200V 370pF 44nC@10V 4V 500mohm@10V 6.8A 81pF P-Channel TO-263(D2PAK) MOSFETs ROHS", JLCPCB Part #=C2629, Manufacturer="Vishay Intertech", Component Type=Transistors, Design Item ID=IRF9640STRLPbF, Manufacturer Part Number=IRF9640STRLPbF
R1 R3: "Resistors. -55C~+155C 50V 51kohm 62.5mW Thick Film Resistor +/-1% +/-100ppm/C 0402 Chip Resistor - Surface Mount ROHS", JLCPCB Part #=C25794, Manufacturer="UNI-ROYAL(Uniroyal Elec)", Component Type=Resistors, Design Item ID=0402WGF5102TCE, Manufacturer Part Number=0402WGF5102TCE
R2 R11_tube1 R11_tube2 R11_tube3 R11_tube4 R11_tube5 R11_tube6 R13_tube1 R13_tube2 R13_tube3 R13_tube4 R13_tube5 R13_tube6 R15_tube1 R15_tube2 R15_tube3 R15_tube4 R15_tube5 R15_tube6 R17_tube1 R17_tube2 R17_tube3 R17_tube4 R17_tube5 R17_tube6 R19_tube1 R19_tube2 R19_tube3 R19_tube4 R19_tube5 R19_tube6 R21_tube1 R21_tube2 R21_tube3 R21_tube4 R21_tube5 R21_tube6 R23_tube1 R23_tube2 R23_tube3 R23_tube4 R23_tube5 R23_tube6 R25_tube1 R25_tube2 R25_tube3 R25_tube4 R25_tube5 R25_tube6 R27_tube1 R27_tube2 R27_tube3 R27_tube4 R27_tube5 R27_tube6 R29_tube1 R29_tube2 R29_tube3 R29_tube4 R29_tube5 R29_tube6 R32_tube1 R32_tube2 R32_tube3 R32_tube4 R32_tube5 R32_tube6 R42 R44: "Resistors. -55C~+155C 1Mohm 50V 62.5mW Thick Film Resistor +/-1% +/-100ppm/C 0402 Chip Resistor - Surface Mount ROHS", JLCPCB Part #=C26083, Manufacturer="UNI-ROYAL(Uniroyal Elec)", Component Type=Resistors, Design Item ID=0402WGF1004TCE, Manufacturer Part Number=0402WGF1004TCE
R4: "Resistors. -55C~+155C 100mW 220kohm 75V Thick Film Resistor +/-1% +/-100ppm/C 0603 Chip Resistor - Surface Mount ROHS", JLCPCB Part #=C22961, Manufacturer="UNI-ROYAL(Uniroyal Elec)", Component Type=Resistors, Design Item ID=0603WAF2203T5E, Manufacturer Part Number=0603WAF2203T5E
R5: "Resistors. -55C~+155C 22ohm 50V 62.5mW Thick Film Resistor +/-1% +/-100ppm/C 0402 Chip Resistor - Surface Mount ROHS", JLCPCB Part #=C25092, Manufacturer="UNI-ROYAL(Uniroyal Elec)", Component Type=Resistors, Design Item ID=0402WGF220JTCE, Manufacturer Part Number=0402WGF220JTCE
R6 R9 R37 R38: "Resistors. -55C~+155C 100kohm 50V 62.5mW Thick Film Resistor +/-1% +/-100ppm/C 0402 Chip Resistor - Surface Mount ROHS", JLCPCB Part #=C25741, Manufacturer="UNI-ROYAL(Uniroyal Elec)", Component Type=Resistors, Design Item ID=0402WGF1003TCE, Manufacturer Part Number=0402WGF1003TCE
R7: "Resistors. -55C~+155C 10kohm 50V 62.5mW Thick Film Resistor +/-1% +/-100ppm/C 0402 Chip Resistor - Surface Mount ROHS", JLCPCB Part #=C25744, Manufacturer="UNI-ROYAL(Uniroyal Elec)", Component Type=Resistors, Design Item ID=0402WGF1002TCE, Manufacturer Part Number=0402WGF1002TCE
R8: "RES 0.02 OHM 1% 1/16W 0402", Device Package="0402 (1005 Metric)", Manufacturer=Yageo, Operating Temperature="-55°C ~ 125°C", Power (Watts)="0.063W, 1/16W", Ratings=AEC-Q200, Resistance="20 mO", Supplier Device Package=0402, Supplier Part Number 1=13-PE0402FRF070R02LCT-ND, Temperature Coefficient=±100ppm/°C, Tolerance=±1%, ComponentLink1Description=Datasheet, ComponentLink1URL=https://www.yageo.com/upload/media/product/productsearch/datasheet/rchip/PYu-PE_521_RoHS_L_10.pdf, ComponentLink2Description="DigiKey Link", ComponentLink2URL=https://www.digikey.com/en/products/detail/yageo/PE0402FRF070R02L/5913693, Composition="Metal Film", Features="Automotive AEC-Q200, Current Sense", Height - Seated (Max)="0.020\" (0.50mm)", lastupdated="4/6/2026 7:41:00 PM", Lifecycle Status=Active, Minimum Order=1, Number of Terminations=2, Package / Case="0402 (1005 Metric)", Packaging=TapeAndReel, Part Number=PE0402FRF070R02L, Part Status=Active, partid=59618, price=0.11, series=PE_L, Size / Dimension="0.039\" L x 0.020\" W (1.00mm x 0.50mm)", Supplier 1=DigiKey
R10: "Resistors. -55C~+155C 50V 6.8kohm 62.5mW Thick Film Resistor +/-1% +/-100ppm/C 0402 Chip Resistor - Surface Mount ROHS", JLCPCB Part #=C25917, Manufacturer="UNI-ROYAL(Uniroyal Elec)", Component Type=Resistors, Design Item ID=0402WGF6801TCE, Manufacturer Part Number=0402WGF6801TCE
R12_tube1 R12_tube2 R12_tube3 R12_tube4 R12_tube5 R12_tube6 R14_tube1 R14_tube2 R14_tube3 R14_tube4 R14_tube5 R14_tube6 R16_tube1 R16_tube2 R16_tube3 R16_tube4 R16_tube5 R16_tube6 R18_tube1 R18_tube2 R18_tube3 R18_tube4 R18_tube5 R18_tube6 R20_tube1 R20_tube2 R20_tube3 R20_tube4 R20_tube5 R20_tube6 R22_tube1 R22_tube2 R22_tube3 R22_tube4 R22_tube5 R22_tube6 R24_tube1 R24_tube2 R24_tube3 R24_tube4 R24_tube5 R24_tube6 R26_tube1 R26_tube2 R26_tube3 R26_tube4 R26_tube5 R26_tube6 R28_tube1 R28_tube2 R28_tube3 R28_tube4 R28_tube5 R28_tube6 R30_tube1 R30_tube2 R30_tube3 R30_tube4 R30_tube5 R30_tube6 R31_tube1 R31_tube2 R31_tube3 R31_tube4 R31_tube5 R31_tube6: "Resistors. -55C~+155C 1kohm 50V 62.5mW Thick Film Resistor +/-1% +/-100ppm/C 0402 Chip Resistor - Surface Mount ROHS", JLCPCB Part #=C11702, Manufacturer="UNI-ROYAL(Uniroyal Elec)", Component Type=Resistors, Design Item ID=0402WGF1001TCE, Manufacturer Part Number=0402WGF1001TCE
R33_tube1 R33_tube2 R33_tube3 R33_tube4 R33_tube5 R33_tube6: "Resistors. -55C~+155C 100mW 330kohm 75V Thick Film Resistor +/-1% +/-100ppm/C 0603 Chip Resistor - Surface Mount ROHS", JLCPCB Part #=C23137, Manufacturer="UNI-ROYAL(Uniroyal Elec)", Component Type=Resistors, Design Item ID=0603WAF3303T5E, Manufacturer Part Number=0603WAF3303T5E
R34_tube1 R34_tube2 R34_tube3 R34_tube4 R34_tube5 R34_tube6: "Resistors. -55C~+155C 100mW 10Mohm 75V Thick Film Resistor +/-1% +/-100ppm/C 0603 Chip Resistor - Surface Mount ROHS", JLCPCB Part #=C7250, Manufacturer="UNI-ROYAL(Uniroyal Elec)", Component Type=Resistors, Design Item ID=0603WAF1005T5E, Manufacturer Part Number=0603WAF1005T5E
R35_tube1 R35_tube2 R35_tube3 R35_tube4 R35_tube5 R35_tube6: "Resistors. -55C~+155C 100mW 24kohm 75V Thick Film Resistor +/-1% +/-100ppm/C 0603 Chip Resistor - Surface Mount ROHS", JLCPCB Part #=C23352, Manufacturer="UNI-ROYAL(Uniroyal Elec)", Component Type=Resistors, Design Item ID=0603WAF2402T5E, Manufacturer Part Number=0603WAF2402T5E
R36: "Resistors. -55C~+155C 1.2kohm 50V 62.5mW Thick Film Resistor +/-1% +/-100ppm/C 0402 Chip Resistor - Surface Mount ROHS", JLCPCB Part #=C25862, Manufacturer="UNI-ROYAL(Uniroyal Elec)", Component Type=Resistors, Design Item ID=0402WGF1201TCE, Manufacturer Part Number=0402WGF1201TCE
R39 R40 R41: "Resistors. -55C~+155C 4.7kohm 50V 62.5mW Thick Film Resistor +/-1% +/-100ppm/C 0402 Chip Resistor - Surface Mount ROHS", JLCPCB Part #=C25900, Manufacturer="UNI-ROYAL(Uniroyal Elec)", Component Type=Resistors, Design Item ID=0402WGF4701TCE, Manufacturer Part Number=0402WGF4701TCE
R43: "Resistors. -55C~+155C 100mW 2.2Mohm 75V Thick Film Resistor +/-1% +/-100ppm/C 0603 Chip Resistor - Surface Mount ROHS", JLCPCB Part #=C22938, Manufacturer="UNI-ROYAL(Uniroyal Elec)", Component Type=Resistors, Design Item ID=0603WAF2204T5E, Manufacturer Part Number=0603WAF2204T5E
SW1 SW3 SW4 SW5 SW6 SW7: "Tactile Switches. -30C~+85C 1.5mm 1.6N 100,000 cycles 12V 5.1mm 5.1mm 50mA Gold No Round Button SPST Surface Mount,Vertical Without Bracket SMD-4P,5.1x5.1mm Tactile Switches ROHS", JLCPCB Part #=C318884, Manufacturer="XKB Connection", Component Type=Switches, Design Item ID=TS-1187A-B-A-B, Manufacturer Part Number=TS-1187A-B-A-B
SW2: "Slide Switches. SS12D07VG4 087", JLCPCB Part #=C2939726, Manufacturer="SHOU HAN()", Component Type=Switches, Design Item ID="SS12D07VG4 087", Manufacturer Part Number="SS12D07VG4 087"
U1: "Audio Transformers. SMD-12 Audio Transformers ROHS", JLCPCB Part #=C7938441, Manufacturer=Coilcraft, Component Type="Integrated Circuits", Design Item ID=DA2032-ALD, Manufacturer Part Number=DA2032-ALD
U2: library part CMP-0491-01033-1, "Boost, Flyback, SEPIC and Inverting Controller-Improved Load Transient, 10-pin SOP (MSE-10-EDP), -40 to 125 degC, Pb-Free", Frequency Adjust Range="100kHz - 1MHz", Manufacturer="Linear Technology", ComponentLink1Description="Manufacturer URL", ComponentLink1URL=http://www.linear.com/, ComponentLink2Description=Datasheet, ComponentLink2URL=http://cds.linear.com/docs/en/datasheet/3757Afd.pdf, ComponentLink3Description="Package Specification", ComponentLink3URL=http://cds.linear.com/docs/en/packaging/05081664_I_MSE.pdf, DatasheetVersion="Rev. D", Mounting Technology="Surface Mount", Number of Outputs=1, PackageDescription="10-Pin Plastic MSOP, Exposed Die Pad, Body 3 x 3 mm, Pitch 0.5 mm", PackageReference=MSE-10, PackageVersion="Rev. I, 05/2013", PartNumber=LT3757AEMSE#PBF, RoHS=TRUE
U3: "Pin Headers. -40C~+105C 1 1x4P 2.54mm 2.54mm 2.5A 3mm 4P 6mm Brass Gold Pin Header Through Hole ,P=2.54mm Pin Headers ROHS", JLCPCB Part #=C5116483, Manufacturer=ZHOURI, Manufacturer Part Number=2.54-1*4, Component Type="Integrated Circuits", Design Item ID=2.54-1_4
U4 U5: library part CMP-04899-000013-1, "IC TRNSLTR BIDIRECTIONAL 24TSSOP", Ambient Temperature Range High=+85°C, Ambient Temperature Range Low=-40°C, Manufacturer="Texas Instruments", Max Junction Temp=+150°C, Max Supply Voltage=5.5V, Min Supply Voltage=2.3V, Nominal Supply Current=5-8uA, Package=PW0024A, Temperature="-40°C to +85°C", Automotive=No, Category=IC, ComponentLink2Description=Datasheet, ComponentLink2URL=http://www.ti.com/lit/ds/symlink/sn74lvcc3245a.pdf, Device Class L1="Integrated Circuits (ICs)", Device Class L2="Logic ICs", Device Class L3="Voltage Level Shifters", Digikey Description="IC TRNSLTR BIDIRECTIONAL 24TSSOP", Height=1.2mm, Lead Free=Yes, Logic Function Desc=Non-Inverting, Manufacturer Part Number=SN74LVCC3245APWR, Mouser Description="Octal Bus Transceiver With Adjustable Output Voltage and 3-State Outputs 24-TSSOP -40 to 85", Number Of Circuits=8, Number Of Inputs=1, Number of Outputs=1, Octopart=https://octopart.com/sn74lvcc3245apwr-texas+instruments-517488, RoHS=TRUE, Standoff Height=0.05mm, Temperature Range High=+85°C, Temperature Range Low=-40°C, V A Max=3.6V, V A Min=2.3V, V B Max=5.5V, V B Min=3V
U6 U7 U8 U9 U10 U11 U12 U13: library part CMP-0780-00172-4, "IC SHFT REG SERIAL 8BIT 14-TSSOP", Ambient Temperature Range High=+125°C, Ambient Temperature Range Low=-40°C, Frequency=36MHz, Manufacturer="Texas Instruments", Max Supply Voltage=6V, Min Supply Voltage=2V, Nominal Supply Current=160uA, Package=PW0014A, Temperature="-40°C to +125°C", Automotive=No, Category=IC, ComponentLink2Description=Datasheet, ComponentLink2URL=http://www.ti.com/lit/ds/symlink/sn74hc164.pdf, Device Class L1="Integrated Circuits (ICs)", Device Class L2="Logic ICs", Device Class L3="Shift Registers", Digikey Description="IC SHFT REG SERIAL 8BIT 14-TSSOP", Height=1.2mm, Lead Free=Yes, Logic Function Desc="Shift Register", Manufacturer Part Number=SN74HC164PWR, Mouser Description="Shift Register Single 8-Bit Serial to Parallel 14-Pin TSSOP T/R", Number Of Circuits=1, Number Of Inputs=2, Number of Outputs=8, Octopart=https://octopart.com/sn74hc164pwr-texas+instruments-500613, Propagation Delay=20ns, RoHS=TRUE, Standoff Height=0.05mm, Temperature Range High=+125°C, Temperature Range Low=-40°C
U14: "ST Microelectronics. -40C~+85C 1.71V~3.6V 12bit 12bit 256KB 32 Bit 64KB 80MHz 83 ARM Cortex-M4 Built-in FLASH LQFP-100(14x14) Microcontrollers (MCU/MPU/SOC) ROHS", JLCPCB Part #=C915966, Manufacturer=STMicroelectronics, Component Type="Integrated Circuits", Design Item ID=STM32L433VCT6, Manufacturer Part Number=STM32L433VCT6
U15: "IC RF TxRx Only WiFi 802.11a/b/g/-c/ax, Bluetooth, GPS 2.4GHz, 5GHz 48-VFQFN Exposed Pad", Package=None, Check_prices=https://www.snapeda.com/parts/NRF7002-QFAA-R7/Nordic+Power/view-part/?ref=eda, MF="Nordic Semiconductors", MP=NRF7002-QFAA-R7, SnapEDA_Link=https://www.snapeda.com/parts/NRF7002-QFAA-R7/Nordic+Power/view-part/?ref=snap
U16: "Power Distribution Switches. -40C~+85C 1 1.1V~5.5V 1A 34mohm Active High Load Switch WCSPD-4(0.79x0.79) Power Distribution Switches ROHS", JLCPCB Part #=C2149807, Manufacturer=TOSHIBA, Component Type="Integrated Circuits", Design Item ID=TCK106AG,LF, Manufacturer Part Number=TCK106AG,LF
U17: "Analog Switches / Multiplexers. -40C~+105C 1.6V~5.5V 2 20mohm 2:1 Fault protection SOT-5X3 Analog Switches, Multiplexers ROHS", JLCPCB Part #=C22399676, Manufacturer="Texas Instruments", Component Type="Integrated Circuits", Design Item ID=TPS2117DRLR, Manufacturer Part Number=TPS2117DRLR
U18: library part CMP-0136-00799-1, "250 mA Low Quiescent Current LDO Regulator, 3-Pin SOT-23A, Extended Temperature, Tape and Reel", DatasheetVersion="revD, Jun-2009", PackageDescription="3-Lead Plastic Small Outline Transistor (CB) [SOT-23A]", PackageReference=SOT-23A-CB3, PackageVersion="revBB, Aug-2009"
U19_tube1 U19_tube2 U19_tube3 U19_tube4 U19_tube5 U19_tube6: "Female Headers. -40C~+105C 1 1x5P 2.54mm 2.54mm 3.2mm 3A 5P 8.5mm Brass Gold Square Hole Through Hole Top ,P=2.54mm Female Headers ROHS", JLCPCB Part #=C54620386, Manufacturer=HMTCONN, Manufacturer Part Number=HMT-2.54-1*5PM, Component Type="Integrated Circuits", Design Item ID=HMT-2.54-1_5PM
U20: "Battery Connectors. -10~100C Battery holder Nickel plated No. 7 - ROHS", JLCPCB Part #=C5290193, Manufacturer=MYOUNG, Component Type="Integrated Circuits", Design Item ID=BH-AAA-A1AJ024, Manufacturer Part Number=BH-AAA-A1AJ024
USB1: "USB Connectors. -20C~+85C 1 1.8A 30V 5,000 times 5P Black Female Micro-B Surface Mount, Right Angle USB 2.0 SMD USB Connectors ROHS", JLCPCB Part #=C404969, Manufacturer="SHOU HAN", Component Type=Connectors, Design Item ID=MicroXNJ, Manufacturer Part Number=MicroXNJ
X1: "Crystals. -30C~+85C 30ohm 40MHz 9pF Crystal Oscillator +/-10ppm SMD3225-4P Crystals ROHS", JLCPCB Part #=C379787, Manufacturer=TST, Component Type="Crystal Oscillators", Design Item ID=TZ0308D, Manufacturer Part Number=TZ0308D
X2: "Crystals. -40C~+85C 12.5pF 32.768kHz 70kohm Crystal Oscillator +/-20ppm SMD3215-2P Crystals ROHS", JLCPCB Part #=C32346, Manufacturer="Seiko Epson", Component Type="Crystal Oscillators", Design Item ID=Q13FC13500004, Manufacturer Part Number=Q13FC13500004
X3: "Crystals. -20C~+70C 120ohm 20pF 4MHz Crystal Oscillator +/-20ppm +/-30ppm HC-49S-SMD Crystals ROHS", JLCPCB Part #=C13774, Manufacturer="YXC Crystal Oscillators", Component Type="Crystal Oscillators", Design Item ID=X49SM4MSD2SC, Manufacturer Part Number=X49SM4MSD2SC

## Free pads (board coordinates)
  round 6 hole 3: 12(4.6,17.2) 12(54,133) 12(109.7,133.2) 12(116.3,6.1)
  rect 0.5x0.54 smd: 13(22.9,21.3) 13(23.4,22) 13(23.9,21.3) 13(24.4,22) 13(24.9,21.3) 13(25.9,22) 13(26.399,21.155) 13(38,27.7) 13(38,28.5) 13(38,29.2) 13(38,29.9)
  rect 0.5x0.54 smd rot 45: 13(33.9,45.9) 13(34.4,45.4) 13(34.975,44.883) 13(35.461,44.358) 13(35.98,43.829)

## Via types
v1: diameter 0.6, hole 0.3, Top Layer to Bottom Layer, 545 vias
v2: diameter 1.27, hole 0.6, Top Layer to Bottom Layer, 97 vias
v3: diameter 1.27, hole 0.711, Top Layer to Bottom Layer, 13 vias
v4: diameter 0.5, hole 0.2, Top Layer to Bottom Layer, 2 vias

## Nets (pads, with @x,y where several pads share a name; then routed paths per layer and width w, separated by ;. In a path a pad name is that pad's centre, name@x,y a point inside that pad or via, vN(x,y) a via of type N, cw(c..) or ccw(c..) an arc to the next point about the centre after c; other vN are vias at no path point)
3V3: C14.2 C15.2 C26.1 C28.1 C29.1 C33.1 C34.1 C37.1 C51.1 C52.1 C53.1 C54.1 C65.2 C66.1 C67.1 C68.1 C69.1 CN1.1 DS1.34 DS1.35 MD1.6 MD1.7 MD1.8 R39.1 R40.1 U3.1 U4.1 U4.2 U5.1 U5.2 U14.6 U14.11 U14.21 U14.22 U14.28 U14.50 U14.73 U14.75 U14.100 U15.13 U15.20 U15.25 U15.31 U16.A2 U18.2 | length 67.3
  Top Layer w0.127: v1(17.248,9.623) 17.248,10.202 C51.1@17.227,10.223 17.248,10.223 17.562,10.537 18.015,10.537 18.048,10.57 U15.13@18.048,10.723 ; v1(17.548,17.223) 17.633,17.308 17.633,17.608 U16.A2@17.649,17.623 ; U15.20@20.848,10.723 20.848,10.183 21.276,9.755 21.276,9.674 21.601,9.349 21.601,9.328 21.621,9.307 21.995,9.307 v1(22.083,9.22) ; v1(23.085,10.323) 23.085,10.345 23.433,10.693 23.439,10.693 23.554,10.807 23.576,10.807 23.748,10.98 C52.1@23.748,11.002 23.576,11.174 23.576,11.426 23.479,11.523 U15.25@23.248,11.523 ; U15.31@23.248,13.923 C53.1@24.37,13.923 24.539,14.093 v1(24.539,14.43)
  Top Layer w0.3: C34.1@13.99,26.475 14.013,26.498 v1(14.675,26.498) 15.337,26.498 C37.1@15.359,26.52 ; v1(14.867,34.908) 14.924,34.85 15.439,34.85 C29.1@15.514,34.775 15.514,34.755 15.724,34.545 15.811,34.545 16.096,34.26 U14.6@16.849,34.26 ; v1(15,30.927) 15,31.008 15.149,31.157 15.149,31.31 C33.1@15.359,31.52 15.359,31.54 15.579,31.76 U14.11@16.849,31.76 ; U14.22@16.849,26.26 15.599,26.26 15.359,26.5 C37.1@15.359,26.52 ; U14.21@16.849,26.76 15.579,26.76 15.359,26.54 C37.1@15.359,26.52 ; v1(17.359,39.81) C28.1@18.169,39.81 18.189,39.81 18.399,39.6 U14.100@18.399,38.31 ; U14.28@19.399,23.21 19.399,21.94 19.629,21.71 C67.1@19.649,21.71 19.654,21.705 19.654,20.915 v1(19.659,20.91) ; U14.50@30.399,23.21 30.399,21.94 30.629,21.71 C69.1@30.649,21.71 30.675,21.685 30.675,21.025 v1(30.7,21) ; U14.73@31.949,35.76 33.099,35.76 33.349,35.51 C68.1@33.369,35.51 33.543,35.337 33.543,34.857 v1(33.6,34.8) ; U14.75@31.949,36.76 32.599,36.76 32.599,36.892 32.978,37.27 33.149,37.27 33.359,37.48 33.389,37.45 33.95,37.45 v1(34,37.4) ; v1(41.2,61.7) 41.155,61.745 39.745,61.745 C14.2@39.7,61.79 39.823,61.913 39.823,62.444 40.069,62.69 40.485,62.69 40.56,62.765 U4.1@40.56,63.181 U4.2@41.21,63.181 ; v1(43.8,61.7) 43.805,61.695 49.165,61.695 ; 49.18,61.71 49.18,63.161 U5.1@49.16,63.181 U5.2@49.81,63.181 ; 49.2,61.69 49.205,61.695 49.878,61.695 v1(49.883,61.7) ; MD1.8@111.25,24.7 v1(112.5,24.7) ; MD1.7@111.25,25.8 v1(112.5,25.8) ; MD1.6@111.25,26.9 v1(112.5,26.9) ; v1(123,28.4) R39.1@123,29.267 ; R40.1@123,32.166 v1(123,32.9)
  Top Layer w1: U18.2@19.65,47.15 20.055,47.15 20.055,47.892 ; U18.2@20.1,47.15 21.53,45.72 v1(21.53,39.793)
  Bottom Layer w0.3: v1(41.2,61.7) v1(43.8,61.7) ; v1(49.883,61.7) 54.3,61.7 57.2,58.8 57.5,58.8
  other v1: 20.9,40.2
5V: C5.1 C6.1 C7.1 C8.1 C10.2 C16.2 C17.2 C18.2 C19.2 C20.2 C21.2 C22.2 C23.2 C24.2 C25.2 R4.2 R41.2 R42.2 U1.7 U1.8 U1.9 U1.10 U2.8 U2.10 U4.24 U5.24 U6.2 U6.14 U7.2 U7.14 U8.2 U8.14 U9.2 U9.14 U10.2 U10.14 U11.2 U11.14 U12.2 U12.14 U13.2 U13.14 U17.3 U17.5 USB1.1 | length 48.1
  Top Layer w0.3: v1(2.4,59.248) R4.2@2.4,58.572 3.7,58.572 U2.10@3.7,58.55 ; v2(4.3,63) 4.3,62.125 C10.2@4.6,61.825 ; C10.2@4.6,61.625 4.793,61.075 4.793,59.626 4.773,59.502 4.7,59.2 U2.8@4.7,58.55 ; v1(12.6,46.6) 12.62,46.58 13.235,46.58 R41.2@13.255,46.561 R42.2@13.255,47.895 ; U17.5@14.46,47.05 14.832,47.05 15.322,46.56 U17.3@15.73,46.56 ; U17.3@15.74,46.55 15.75,46.56 16.268,46.56 16.485,46.777 16.496,46.777 16.819,47.1 v1(16.9,47.1) ; v1(40.535,71.281) 40.545,71.271 C16.2@40.545,70.581 40.552,70.573 40.552,68.989 U4.24@40.56,68.981 ; v1(49.135,71.181) 49.14,71.176 49.14,70.486 C17.2@49.145,70.481 49.152,70.473 49.152,68.989 U5.24@49.16,68.981 ; v1(61.25,67.7) U13.2@61.25,68.9 ; U13.14@61.9,63.3 61.925,63.275 61.925,62.115 62.14,61.9 C25.2@62.16,61.9 62.155,61.895 62.155,61.205 v1(62.15,61.2) ; v1(66.95,67.7) 66.975,67.725 66.975,68.875 U12.2@67,68.9 ; U12.14@67.65,63.3 67.675,63.275 67.675,62.075 67.855,61.895 67.855,61.205 v1(67.85,61.2) ; v1(72.75,67.7) 72.775,67.725 72.775,68.875 U11.2@72.8,68.9 ; U11.14@73.45,63.3 73.475,63.275 73.475,62.075 C23.2@73.65,61.9 ; v1(73.65,61.2) C23.2@73.65,61.865 ; v1(78.55,67.7) U10.2@78.55,68.9 ; U10.14@79.2,63.3 79.225,63.275 79.225,62.11 79.435,61.9 C22.2@79.45,61.9 v1(79.45,61.2) ; v1(84.35,67.7) U9.2@84.35,68.9 ; U9.14@85,63.3 85.025,63.275 85.025,62.11 85.235,61.9 C21.2@85.25,61.9 v1(85.25,61.2) ; v1(90.15,67.7) U8.2@90.15,68.9 ; U8.14@90.8,63.3 90.825,63.275 90.825,62.035 C20.2@90.96,61.9 90.955,61.895 90.955,61.205 v1(90.95,61.2) ; v1(95.95,67.7) U7.2@95.95,68.9 ; U7.14@96.6,63.3 96.625,63.275 96.625,62.025 96.755,61.895 96.755,61.205 v1(96.75,61.2) ; v1(101.65,67.7) 101.675,67.725 101.675,68.875 U6.2@101.7,68.9 ; U6.14@102.35,63.3 102.375,63.275 102.375,62.085 C18.2@102.56,61.9 102.555,61.895 102.555,61.105 v1(102.55,61.1)
  Top Layer w0.6: v3(2.2,47.6) 2.307,47.6 2.861,47.046 4.483,47.046 6.136,47.046 6.702,47.612 v3(6.797,47.612)
  other v3: 12.7,57.1 17.2,57.1
170V: C1.2 C2.2 C3.2 D1.1 Q13_tube1.3 Q13_tube2.3 Q13_tube3.3 Q13_tube4.3 Q13_tube5.3 Q13_tube6.3 R2.2 R33_tube1.1 R33_tube2.1 R33_tube3.1 R33_tube4.1 R33_tube5.1 R33_tube6.1 | length 82
  Top Layer w0.3: R2.2@5.833,51.6 6.71,51.6 7.81,50.5 32.592,50.5 36.7,54.608 36.7,69.924 36.524,70.1 35.741,70.1
  Top Layer w0.7: v2(5,115.9) 4.98,115.92 Q13_tube6.3@4.98,118.227 ; Q13_tube6.3@5.26,119.453 4.96,119.153 Q13_tube6.3@4.96,118.386 4.98,118.366 Q13_tube6.3@4.98,118.227 ; R33_tube6.1@6.6,117.947 5.26,117.947 Q13_tube6.3@4.98,118.227 ; v2(29.7,115.9) 29.68,115.92 Q13_tube5.3@29.68,118.227 ; Q13_tube5.3@29.96,119.453 29.66,119.153 Q13_tube5.3@29.66,118.386 29.68,118.366 Q13_tube5.3@29.68,118.227 ; R33_tube5.1@31.3,117.947 29.96,117.947 Q13_tube5.3@29.68,118.227 ; v2(60.6,115.9) 60.58,115.92 Q13_tube4.3@60.58,118.227 ; Q13_tube4.3@60.86,119.453 60.56,119.153 Q13_tube4.3@60.56,118.386 60.58,118.366 Q13_tube4.3@60.58,118.227 ; R33_tube4.1@62.2,117.947 60.86,117.947 Q13_tube4.3@60.58,118.227 ; v2(85.3,115.9) 85.28,115.92 Q13_tube3.3@85.28,118.227 ; Q13_tube3.3@85.56,119.453 85.26,119.153 Q13_tube3.3@85.26,118.386 85.28,118.366 Q13_tube3.3@85.28,118.227 ; R33_tube3.1@86.9,117.947 85.56,117.947 Q13_tube3.3@85.28,118.227 ; v2(116.2,115.9) 116.18,115.92 Q13_tube2.3@116.18,118.227 ; Q13_tube2.3@116.46,119.453 116.16,119.153 Q13_tube2.3@116.16,118.386 116.18,118.366 Q13_tube2.3@116.18,118.227 ; R33_tube2.1@117.8,117.947 116.46,117.947 Q13_tube2.3@116.18,118.227 ; v2(140.9,115.9) 140.88,115.92 Q13_tube1.3@140.88,118.227 ; Q13_tube1.3@141.16,119.453 140.86,119.153 Q13_tube1.3@140.86,118.386 140.88,118.366 Q13_tube1.3@140.88,118.227 ; R33_tube1.1@142.5,117.947 141.16,117.947 Q13_tube1.3@140.88,118.227
  other v3: 33.5,65.7 35.35,65.7
\CLR_5V: U4.19 U6.9 U7.9 U8.9 U9.9 U10.9 U11.9 U12.9 U13.9 | length 75.3
  Top Layer w0.3: U4.19@43.81,68.981 43.885,68.906 43.885,68.218 46.549,65.554 v1(58.65,65.554) v1(64.45,65.554) v1(70.25,65.554) ; U13.9@58.65,63.3 v1(58.65,64.4) ; U12.9@64.4,63.3 64.425,63.325 64.425,64.375 v1(64.45,64.4) ; U11.9@70.2,63.3 70.225,63.325 70.225,64.174 70.371,64.32 v1(70.371,64.4) ; v1@70.267,65.571 75.933,65.571 v1(75.95,65.554) v1(81.75,65.554) v1(87.55,65.554) v1(93.35,65.554) v1(99.15,65.554) ; U10.9@75.95,63.3 v1(75.95,64.4) ; U9.9@81.75,63.3 v1(81.75,64.4) ; U8.9@87.55,63.3 v1(87.55,64.4) ; U7.9@93.35,63.3 v1(93.35,64.4) ; U6.9@99.1,63.3 99.125,63.325 99.125,64.375 v1(99.15,64.4)
  Bottom Layer w0.3: v1(58.65,64.4) v1(58.65,65.554) ; v1(64.45,64.4) v1(64.45,65.554) ; v1(70.25,65.554) 70.25,65.473 70.371,65.352 v1(70.371,64.4) ; v1(75.95,64.4) v1(75.95,65.554) ; v1(81.75,64.4) v1(81.75,65.554) ; v1(87.55,64.4) v1(87.55,65.554) ; v1(93.35,64.4) v1(93.35,65.554) ; v1(99.15,64.4) v1(99.15,65.554)
\DISPLAY_RESET: DS1.39 pad.13@35.98,43.829 U14.47 | length 44.9
  Top Layer w0.3: U14.47@28.9,23.21 28.9,23.86 28.826,23.933 28.826,36.082 29.401,36.657 v1(29.401,36.7) ; v1(35.1,42.8) 35.15,42.8 47.15,54.8 v1(48.6,54.8)
  Bottom Layer w0.3: v1(29.401,36.7) 29.401,37.101 v1(35.1,42.8) ; v1(48.6,54.8) 48.624,54.8 51.375,57.551 51.399,57.551 DS1.39@51.584,57.737
\DISPLAY_SPI_CS: DS1.40 pad.13@33.9,45.9 U14.43 | length 45.9
  Top Layer w0.3: v1(26.492,36.7) 26.492,36.66 26.9,36.252 U14.43@26.9,23.21 ; v1(33.043,44.857) 45.922,57.737 DS1.40@49.044,57.737
  Bottom Layer w0.3: v1(26.492,36.7) 26.492,38.307 v1(33.043,44.857)
\SPI2_CS: U14.51
\WIFI_QSPI_CS: pad.13@26.399,21.155 U14.42 U15.36 | length 8.8
  Top Layer w0.127: U15.36@23.248,15.923 23.434,15.923 23.467,15.957 23.467,16.367 v1(23.5,16.4) ; v1(24.5,17.2) 26.399,19.099 U14.42@26.399,23.21
  Bottom Layer w0.127: v1(23.5,16.4) 23.6,16.4 24.4,17.2 v1(24.5,17.2)
AFELDO: C48.1 U15.19 | length 1.3
  Top Layer w0.127: U15.19@20.448,10.723 20.448,10.159 20.748,9.859 C48.1@20.748,9.502
AN_COMMON_tube1: R35_tube1.2 U19_tube1.5 | length 2.9
  Top Layer w0.7: R35_tube1.2@141.853,102.7 143.932,102.7 144.327,102.304 U19_tube1.5@144.55,102.304
AN_COMMON_tube2: R35_tube2.2 U19_tube2.5 | length 2.9
  Top Layer w0.7: R35_tube2.2@117.153,102.7 119.232,102.7 119.627,102.304 U19_tube2.5@119.85,102.304
AN_COMMON_tube3: R35_tube3.2 U19_tube3.5 | length 2.9
  Top Layer w0.7: R35_tube3.2@86.253,102.7 88.332,102.7 88.727,102.304 U19_tube3.5@88.95,102.304
AN_COMMON_tube4: R35_tube4.2 U19_tube4.5 | length 2.9
  Top Layer w0.7: R35_tube4.2@61.553,102.7 63.632,102.7 64.027,102.304 U19_tube4.5@64.25,102.304